# Allegro board SAFELIGHT1_4.brd
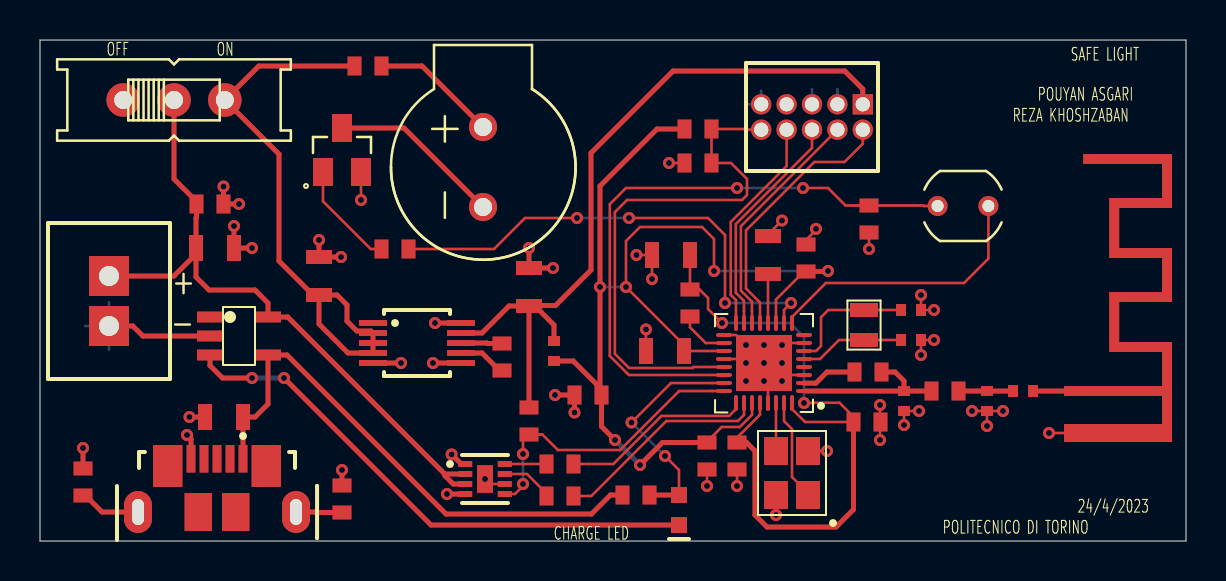
[diagram p0: board, top side]
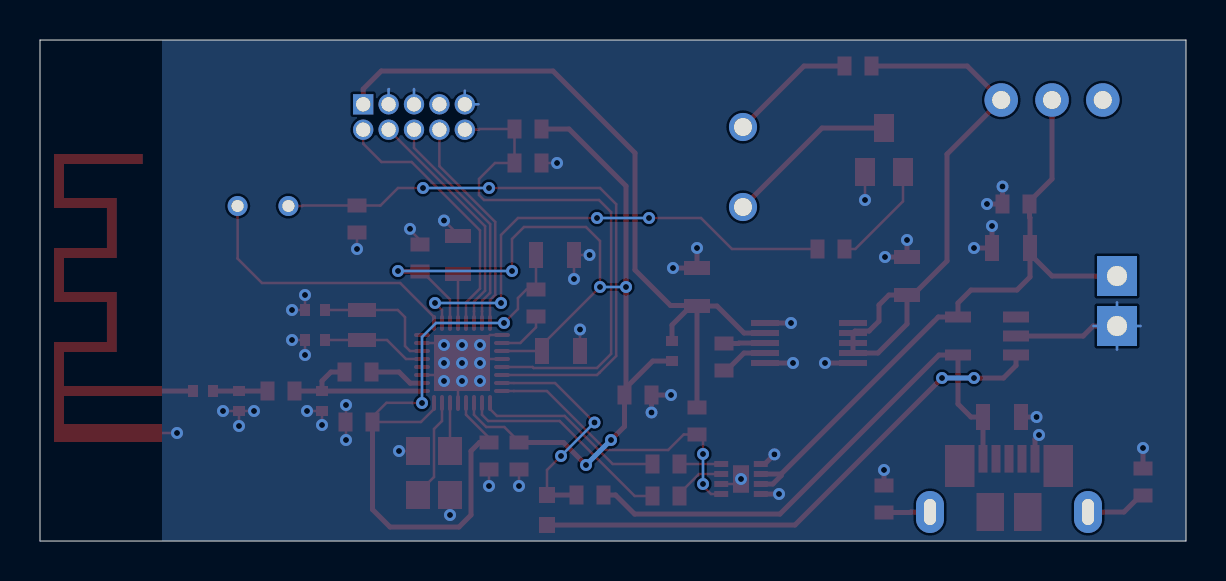
[diagram p1: board, bottom side, seen from below]

Outline 57.3 x 25.05 mm; copper layers: TOP, BOTTOM. Coordinates in mm from the lower left corner of the outline.
Outline path: 0,25.05 0,0 57.3,0 57.3,25.05 0,25.05

## Design rules (mm)
constraint set DEFAULT: min track width 0.127

## Placement (name value [footprint] x y rotation side)
A1  TI AN043  [AN043_PATCH_ANTENNA]  51.7 4.45 270 top
BJT1  MMBT3904  [SOT95P240X120-3N]  15.1 19.55 0 top
BUZ1  AT-1127-ST-2-R  [XDCR_AT-1127-ST-2-R]  22.15 18.7 90 top
C1  12p  [0402_C]  43.55 10.05 0 top
C2  12p  [0402_C]  43.55 11.55 0 top
C3  1uF  [0805_C]  36.4 14.3 270 top
C4  100nF  [0603_C]  38.3 14.15 90 top
C5  100nF  [0603_C]  33.35 4.25 270 top
C6  10uF  [0805_C]  31.25 9.5 180 top
C7  10uF  [0805_C]  31.55 14.3 180 top
C8  100nF  [0603_C]  27.4 7.3 180 top
C9  100nF  [0603_C]  41.35 5.95 0 top
C10  100nF  [0603_C]  34.85 4.25 270 top
C11  12pF  [0402_C]  49.15 7.5 0 top
C12  1.2pF  [0402_C]  43.2 7 270 top
C13  1.2pF  [0402_C]  47.35 7 270 top
C14  100nF  [0603_C]  32.9 18.9 180 top
C15  330nF  [0603_C]  23.1 9.2 270 top
C16  10uF  [0805_C]  24.45 12.7 90 top
C17  10uF  [0805_C]  13.95 13.25 90 top
C18  1uF  [0805_C]  8.75 14.65 0 top
C19  100nF  [0603_C]  8.5 16.85 0 top
C20  1uF  [0805_C]  9.2 6.2 180 top
CHC1  MAXIM MAX1555  [SMD_MAX1555]  9.95 10.25 270 top
CON1  JST B2B-XH-A LF SN  [B2B-XH-A]  3.45 12 90 top
CYS1  24MHz  [TSX-3225_XTAL]  37.6 3.4 90 top
CYS2  32.768MHz  [SC-20S_XTAL]  41.2 10.8 90 top
FG1  MAXIM MAX17048  [MAX17048]  22.25 3.1 270 top
J1  SAMTEC FTSH-105-01-L-D-K  [SAMTEC_FTSH-105-01-L-D-K]  38.6 21.2 180 top
L1  10uH  [0603_L]  32.5 11.9 90 top
L2  FerriteBead  [0402_L]  25.7 9.5 270 top
L3  15nH  [0603_L]  41.4 8.45 0 top
L4  2nH  [0603_L]  45.25 7.5 0 top
LED1  GEN  [0603_LED]  31.95 1.55 90 top
LS1  -  [PDV-P8001]  46.15 16.75 180 top
M1  TI CC2640R2F RSM  [CC2640R2FRSM]  36.2 8.9 90 top
R1  33  [0603_R]  16.4 23.75 0 top
R2  2k  [0603_R]  17.75 14.6 180 top
R3  2k  [0603_R]  41.45 16.1 270 top
R4  100K  [0603_R]  32.9 20.6 0 top
R5  33K  [0603_R]  2.15 2.95 270 top
R6  3.3K  [0603_R]  24.45 6 270 top
R7  220  [0603_R]  26 2.25 0 top
R8  220  [0603_R]  26 3.85 0 top
R9  200  [0603_R]  29.8 2.3 0 top
R10  33K  [0603_R]  15.1 2.1 90 top
SW1  SIS  [EG1218]  6.7 22.05 0 top
USB1  MOLEX 1051640001  [MOLEX_105164-0001]  8.85 3 0 top
VR1  MAXIM MAX1759  [MAX1759]  18.85 9.9 270 top

## Library data of the parts
A1 = ANTENNA
BJT1 = MMBT3904
BUZ1 = AT-1127-ST-2-R
C1-C20 = CAP
CHC1 = MAX1555
CON1 = JST B2B-XH-A LF SN
CYS1 = CRYSTAL_24M
CYS2 = CRYSTAL_32768
FG1 = MAXIM MAX17048
J1 = SAMTEC FTSH-105-01-L-D-K
L1 L3 L4 = IND
L2 = FerriteBead
LED1 = LED
LS1 = PDV-P8001
M1 = CC2640
R1-R10 = RES
SW1 = SIS
USB1 = MOLEX 1051640001
VR1 = MAX1759

## Footprints (pads in the part's own frame, mm; a bottom-side part is the same pattern mirrored in y, then rotated)
0402_C
  rect 0.5x0.6 smd: 1(-0.5,0) 2(0.5,0)
0402_L
  rect 0.5x0.6 smd: 1(-0.5,0) 2(0.5,0)
0603_C
  rect 0.7x0.95 smd: 1(-0.675,0) 2(0.675,0)
0603_L
  rect 0.7x0.95 smd: 1(-0.675,0) 2(0.675,0)
0603_LED
  rect 0.8x0.8 smd: 1(-0.75,0) 2(0.75,0)
0603_R
  rect 0.7x0.95 smd: 1(-0.675,0) 2(0.675,0)
0805_C
  rect 0.7x1.3 smd: 1(-0.95,0) 2(0.95,0)
AN043_PATCH_ANTENNA
  rect 0.9x0.5 smd: 1(-0.95,-0.25)
  rect 0.5x0.5 smd: 2(-3.05,-0.25)
B2B-XH-A
  rect 2x2 hole 1: 1(-1.25,0) 2(1.25,0)
CC2640R2FRSM
  rrect 0.2x0.8 smd: 1(-1.4,-2) 2(-1,-2) 3(-0.6,-2) 4(-0.2,-2) 5(0.2,-2) 6(0.6,-2) 7(1,-2) 8(1.4,-2) 24(-1.4,2)
  rrect 0.8x0.2 smd: 9(2,-1.4) 10(2,-1) 11(2,-0.6) 12(2,-0.2) 13(2,0.2) 14(2,0.6) 15(2,1) 16(2,1.4) 25(-2,1.4) 26(-2,1) 27(-2,0.6) 28(-2,0.2) 29(-2,-0.2) 30(-2,-0.6) 31(-2,-1) 32(-2,-1.4)
  rrect 0.2x0.8 smd rot 0.2: 17(1.4,2) 18(1,2) 19(0.6,2) 20(0.2,2) 21(-0.2,2) 22(-0.6,2) 23(-1,2)
  rect 2.8x2.8 smd: 33(0,0)
EG1218
  round 1.676 hole 0.9: O(-2.54,0) P(0,0) S(2.54,0)
MAX1759
  rect 0.3x1.4 smd: 1(-1,-2.2) 2(-0.5,-2.2) 3(0,-2.2) 4(0.5,-2.2) 5(1,-2.2) 6(1,2.2) 7(0.5,2.2) 8(0,2.2) 9(-0.5,2.2) 10(-1,2.2)
MAX17048
  rect 0.3x0.7 smd: 1(-0.75,-0.99) 2(-0.25,-0.99) 3(0.25,-0.99) 4(0.75,-0.99) 5(0.75,0.99) 6(0.25,0.99) 7(-0.25,0.99) 8(-0.75,0.99)
  rect 1.38x0.8 smd: 9(0,0)
MOLEX_105164-0001
  rect 0.45x1.38 smd: 1(1.3,1.11) 2(0.65,1.11) 3(0,1.11) 4(-0.65,1.11) 5(-1.3,1.11)
  rect 1.375x1.9 smd: P1(-0.938,-1.55) P2(0.938,-1.55)
  rect 1.475x2.1 smd: P3(-2.462,0.75) P4(2.462,0.75)
  oval 1.4x2.1 hole 0.6x1.3: S1(-3.95,-1.55) S2(3.95,-1.55)
PDV-P8001
  round 1 hole 0.6: 1(-1.27,0) 2(1.27,0)
SAMTEC_FTSH-105-01-L-D-K
  rect 1.016x1.016 hole 0.711: 1(-2.54,-0.635)
  round 1.016 hole 0.711: 2(-2.54,0.635) 3(-1.27,-0.635) 4(-1.27,0.635) 5(0,-0.635) 6(0,0.635) 7(1.27,-0.635) 8(1.27,0.635) 9(2.54,-0.635) 10(2.54,0.635)
SC-20S_XTAL
  rect 0.7x1.4 smd: 1(-0.75,0) 2(0.75,0)
SMD_MAX1555
  rect 0.55x1.3 smd: 1(-0.95,-1.45) 2(0,-1.45) 3(0.95,-1.45) 4(0.95,1.45) 5(-0.95,1.45)
SOT95P240X120-3N
  rect 1x1.4 smd: 1(-0.95,-1.1) 2(0.95,-1.1) 3(0,1.1)
TSX-3225_XTAL
  rect 1.4x1.2 smd: 1(-1.1,-0.8) 2(1.1,-0.8) 3(1.1,0.8) 4(-1.1,0.8)
XDCR_AT-1127-ST-2-R
  round 1.408 hole 0.9: N(-2,0) P(2,0)

## Nets
GND: A1.1(-) BJT1.2(E) C1.2(B) C2.2(B) C3.1 C4.2(B) C5.2(B) C6.2(B) C7.2(B) C8.2(B) C9.2(B) C10.2(B) C12.2(B) C13.2(B) C14.2(B) C16.2(B) C17.2(B) C18.2(B) C19.2(B) C20.2(B) CHC1.2 CON1.1 CYS1.2 CYS1.4 FG1.1 FG1.4 FG1.6 FG1.9 J1.3 J1.5 J1.9 M1.3 M1.7 M1.17 M1.20 M1.29 M1.33 R3.2(B) R5.1 R10.2(B) USB1.5 VR1.5 VR1.6 VR1.10
VCC: C16.1 J1.1 L2.1 R6.1 VR1.9
VDDR: C7.1 C9.1 C10.1 L1.2(B) M1.28 M1.32
VDDS: C4.1 C5.1 C6.1 C8.1 L2.2(B) M1.11 M1.19 M1.27 R4.1
ALRTN: FG1.5 M1.24 R6.2(B)
ANTENNA: A1.2 C11.2(B)
BAT+: C18.1 C19.1 CHC1.5 CON1.2 FG1.2 FG1.3(VDD) SW1.P
BUZ: M1.10 R2.1
BUZ_IN: BUZ1.P R1.2(B)
BUZZNEG: BJT1.3 BUZ1.N
CHG: CHC1.3 LED1.1(-)
CXN: C15.2(B) VR1.7
CXP: C15.1 VR1.8
DC: C20.1 CHC1.4 R9.1 USB1.1
DCDC_IN: C17.1 R1.1 SW1.S VR1.2(SHDN) VR1.3 VR1.4
DCDC_SW: L1.1 M1.18
DCOUPL: C3.2(B) M1.12
FILTER: C11.1 C13.1 L4.2(B)
LED: LED1.2 M1.23 R9.2(B)
RESET: C14.1 J1.10 M1.21 R4.2(B)
RF_N: L3.1 M1.2
RF_P: C12.1 L3.2(B) L4.1 M1.1
SCL: M1.26 R7.2(B)
SCL_OUT: FG1.7 R7.1
SDA: M1.25 R8.2(B)
SDA_OUT: FG1.8 R8.1
SENSOR_MTR: LS1.2(PS2) M1.22 R3.1
SENSOR_ON: LS1.1 M1.9
TCKC: J1.4 M1.14
TDI: J1.8 M1.16
TDO: J1.6 M1.15
TMSC: J1.2 M1.13
TRB: BJT1.1 R2.2(B)
X24M_N: CYS1.3 M1.30
X24M_P: CYS1.1 M1.31
X32K_Q1: C1.1 CYS2.1 M1.5
X32K_Q2: C2.1 CYS2.2(B) M1.6(X32K_Q2)
N183563: R5.2(B) USB1.S1
N183606: R10.1 USB1.S2(SHIELD2)

Pads without a net: CHC1 1; J1 7; M1 4 8; SW1 O; USB1 2 3 4 P1 P2 P3 P4; VR1 1

## Via types
v1: diameter 0.6, hole 0.3, TOP to BOTTOM, 73 vias

## Routing (per net, layer and track width the routed paths; a pad name or vN(x,y) marks a point on that pad's centre or on a via; arc(x,y) is an arc through that point)
GND: length 60.4
  TOP w0.127: C3.1 36.4,15.32 v1(37.1,16.02) ; M1.3 37.4,8.3 v1(37.1,8) ; 32.22,18.9 v1(31.45,18.9) ; v1(22.25,3.1) 22.5,2.85 FG1.6 ; v1(38.8,15.61) 38.8,15.55 38.3,15.05 C4.2 ; CYS1.2 v1(39.35,4.5) ; v1(44.05,9.3) C1.2 v1(44.7,10.05) ; M1.20 35.1,9.1 v1(35.3,8.9) ; v1(30.6,13.1) C7.2 v1(29.82,14.3) ; v1(50.45,5.4) A1.1 ; v1(47.35,5.75) C13.2 ; C13.2 v1(48.15,6.5) ; C13.2 v1(46.6,6.5) ; v1(43.95,6.5) C12.2 v1(43.2,5.8) ; R3.2 v1(41.45,14.6) ; M1.29 36.4,7.8 v1(36.2,8) ; v1(37.1,9.8) 37.2,9.9 M1.7 ; v1(44.7,11.55) C2.2 v1(44.05,12.3) ; C6.2 v1(30.3,10.58) ; v1(42,6.8) 42,5.98 C9.2 42,5.93 v1(42,5.05) ; C10.2 v1(34.85,2.75) ; M1.17 34.8,10.3 v1(35.3,9.8) ; CYS1.4 v1(36.8,1.3) ; C5.2 v1(33.35,2.75) ; BJT1.2 v1(16.05,17.05)
  TOP w0.25: v1(26.72,6.43) 26.72,7.3 v1(25.75,7.3) ; R5.1 v1(2.15,4.65) ; v1(24.45,14.65) C16.2 v1(25.65,13.65) ; v1(7.47,6.2) C20.2 ; FG1.4 v1(20.35,2.35) ; v1(20.58,4.33) 21.06,3.85 FG1.1 ; VR1.6 v1(19.65,8.9) ; CHC1.2 5.14,10.25 4.64,10.75 CON1.1 ; v1(7.35,5.3) 7.55,5.1 USB1.5 ; v1(10.6,14.65) C18.2 v1(9.7,15.75) ; v1(15.05,14.2) C17.2 v1(13.95,15.05) ; v1(9.17,17.73) C19.2 v1(9.95,16.85) ; VR1.10 v1(19.75,10.9) ; R10.2 v1(15.1,3.55) ; VR1.5 v1(18.05,8.9)
  BOTTOM w0.127: J1.5 38.6,22.6 ; CON1.1 3.45,11.93 ; CON1.1 3.45,9.57 ; CON1.1 4.63,10.75 ; CON1.1 2.27,10.75 ; 36.06,22.52 J1.9 35.37,21.84 ; 39.85,22.6 39.87,22.58 J1.3
  vias: v1(35.3,8) v1(36.2,9.8) v1(36.2,8.9) v1(37.1,8.9)
VCC: length 37.3
  TOP w0.25: C16.1 23.45,11.75 22.1,10.4 VR1.9 ; C16.1 24.47,11.77 24.73,11.77 ; C16.1 24.45,6.68 ; J1.1 41.14,22.59 40.23,23.5 31.65,23.5 27.55,19.4 27.55,13.55 25.77,11.77 24.73,11.77 ; L2.1 25.7,10.8 24.73,11.77
VDDR: length 35.3
  TOP w0.127: M1.28 36,6.32 34.85,5.17 C10.1 ; C7.1 L1.2 32.97,12.58 33.4,12.15 33.4,11.6 v1(34.1,10.9) ; v1(38.2,6.9) 38.69,6.9 38.7,6.91 39.98,6.91 40.67,6.21 C9.1 38.25,5.95 37.6,6.6 M1.32
  TOP w0.25: C9.1 40.67,1.58 39.8,0.7 36.35,0.7 35.75,1.3 35.75,4.5 35.33,4.93 C10.1
  BOTTOM w0.127: v1(38.2,6.9) 38.2,10.2 37.5,10.9 v1(34.1,10.9)
VDDS: length 56.9
  TOP w0.127: M1.19 C6.1 32.2,9.8 v1(29.3,12.7) 29.3,15 30,15.7 33.1,15.7 33.7,15.1 v1(33.7,13.5) ; C5.1 33.35,4.97 34.08,5.7 34.99,5.7 35.6,6.31 M1.27 ; C4.1 38.2,13.48 36.8,12.08 M1.11
  TOP w0.25: v1(30,3.8) 31.12,4.93 C5.1 ; v1(28.75,5.05) 28.08,5.73 C8.1 28,7.38 28,7.66 ; C4.1 39.38,13.48 v1(39.4,13.5) ; 28,7.66 26.66,9 L2.2 ; 28,7.66 v1(28,12.7) 28,17.75 30.85,20.6 32.22,20.6
  BOTTOM w0.127: v1(33.7,13.5) v1(39.4,13.5) ; v1(29.3,12.7) v1(28,12.7)
  BOTTOM w0.25: v1(30,3.8) v1(28.75,5.05)
ALRTN: length 15.1
  TOP w0.127: v1(24.15,2.85) 24.15,2.75 23.75,2.35 FG1.5 ; M1.24 33.61,7.5 33.61,7.5 31.95,7.5 29.01,4.55 25.89,4.55 25.12,5.33 R6.2 24.15,5.03 v1(24.15,4.35)
  BOTTOM w0.127: v1(24.15,4.35) v1(24.15,2.85)
ANTENNA: length 1.8
  TOP w0.25: C11.2 A1.2
BAT+: length 33.4
  TOP w0.25: 20.24,3.34 20.25,3.35 FG1.2 ; 20.24,3.34 20.24,3.27 20.66,2.85 FG1.3 ; 20.24,3.34 12.38,11.2 CHC1.5 11.4,11.9 10.75,12.55 8.45,12.55 7.8,13.2 7.8,14.35 ; CON1.2 6.7,13.25 7.8,14.35 ; 7.8,14.35 C18.1 7.8,16.16 7.83,16.18 C19.1 7.83,16.98 6.7,18.1 SW1.P
BUZ: length 24.7
  TOP w0.127: v1(26.85,16.15) 24.25,16.15 22.7,14.6 R2.1 ; v1(29.45,16.15) 33.4,16.15 34.25,15.3 v1(34.25,11.9) ; M1.10 37.2,11.55 v1(37.55,11.9)
  BOTTOM w0.127: v1(37.55,11.9) v1(34.25,11.9) ; v1(26.85,16.15) v1(29.45,16.15)
BUZ_IN: length 6.4
  TOP w0.25: 22.2,20.65 BUZ1.P 19.1,23.75 R1.2
BUZZNEG: length 8.8
  TOP w0.25: 22.2,16.65 BUZ1.N 18.2,20.65 BJT1.3
CHG: length 27.3
  TOP w0.25: v1(10.6,8.15) 9.12,8.15 8.5,8.77 CHC1.3 ; v1(12.2,8.15) 19.55,0.8 LED1.1
  BOTTOM w0.25: v1(12.2,8.15) v1(10.6,8.15)
CXN: length 2.4
  TOP w0.25: VR1.7 22.1,9.4 22.97,8.53 C15.2
CXP: length 2.1
  TOP w0.25: VR1.8 22.35,9.9 22.37,9.88 C15.1
DC: length 27.5
  TOP w0.25: USB1.1 C20.1 10.75,6.2 11.4,6.85 CHC1.4 12.35,9.3 20.3,1.35 27.57,1.35 28.52,2.3 R9.1
DCDC_IN: length 28.8
  TOP w0.25: C17.1 13.95,10.85 15.4,9.4 VR1.4 VR1.3 VR1.2 16.55,10.5 15.85,10.5 15.35,10.99 15.35,11.8 14.85,12.3 C17.1 ; C17.1 13.65,12.3 11.95,14 11.95,19.34 SW1.S 10.94,23.75 15.72,23.75
DCDC_SW: length 2.6
  TOP w0.127: L1.1 32.5,10.68 33.28,9.9 M1.18
DCOUPL: length 2.5
  TOP w0.127: C3.2 M1.12
FILTER: length 2.7
  TOP w0.25: C11.1 C13.1 L4.2
LED: length 11.5
  TOP w0.127: v1(31.25,4.25) 31.95,3.55 LED1.2 ; M1.23 33.61,7.9 31.55,7.9 v1(29.58,5.93)
  TOP w0.25: R9.2 LED1.2
  BOTTOM w0.127: v1(29.58,5.93) v1(31.25,4.25)
RESET: length 26.9
  TOP w0.127: M1.21 32.67,8.7 32.62,8.65 29.45,8.65 28.74,9.36 28.74,16.44 29.35,17.05 35.1,17.05 35.35,17.3 35.35,18.1 34.55,18.9 C14.1 R4.2 35.33,20.6 35.36,20.57 J1.10
RF_N: length 2.8
  TOP w0.25: M1.2 38.21,7.89 38.79,7.89 39.35,8.45 L3.1
RF_P: length 8.2
  TOP w0.25: C12.1 43.2,8 42.75,8.45 42.08,8.45 ; C12.1 M1.1 ; C12.1 L4.1
SCL: length 10.8
  TOP w0.127: M1.26 35.2,6.31 34.89,6 31.32,6 27.57,2.25 R7.2
SCL_OUT: length 2.6
  TOP w0.127: R7.1 25.33,2.38 24.35,3.35 FG1.7
SDA: length 9.6
  TOP w0.127: R8.2 28.67,3.85 31.07,6.25 34.46,6.25 34.8,6.6 M1.25
SDA_OUT: length 2.1
  TOP w0.127: FG1.8 R8.1
SENSOR_MTR: length 30.8
  TOP w0.127: M1.22 29.45,8.3 29.34,8.41 29.34,8.41 28.49,9.25 28.49,16.84 29.3,17.65 v1(34.85,17.65) ; v1(38.15,17.65) 39.4,17.65 40.27,16.78 R3.1 44.16,16.78 44.19,16.75 LS1.2
  BOTTOM w0.127: v1(38.15,17.65) v1(34.85,17.65)
SENSOR_ON: length 14
  TOP w0.127: LS1.1 47.42,14.12 46.2,12.9 39.29,12.9 37.6,11.2 M1.9
TCKC: length 11.9
  TOP w0.127: M1.14 35.6,11.49 35.6,11.49 35.6,11.96 35.05,12.52 35.05,15.74 J1.4
TDI: length 10.9
  TOP w0.127: J1.8 37.33,18.74 34.54,15.95 34.54,12.31 34.6,12.24 34.8,12.05 34.8,11.54 M1.16
TDO: length 11.4
  TOP w0.127: J1.6 38.6,19.65 34.79,15.85 34.79,12.41 34.83,12.37 35.2,12 35.2,11.49 35.2,11.49 M1.15
TMSC: length 13.3
  TOP w0.127: J1.2 41.14,19.87 40.22,18.95 38.72,18.95 35.3,15.53 35.3,12.62 36,11.92 M1.13
TRB: length 5.4
  TOP w0.127: R2.2 16.53,14.6 14.15,16.98 BJT1.1
X24M_N: length 2.4
  TOP w0.127: CYS1.3 M1.30
X24M_P: length 5.1
  TOP w0.127: CYS1.1 38.4,2.4 37.6,3.2 37.6,5.6 37.2,6 M1.31
X32K_Q1: length 5.2
  TOP w0.127: M1.5 39,9.1 39.95,10.05 CYS2.1 C1.1
X32K_Q2: length 6.5
  TOP w0.127: M1.6 38.8,9.5 39.05,9.75 39.05,11.19 39.41,11.55 CYS2.2 C2.1
N183563: length 3.1
  TOP w0.25: USB1.S1 3.1,1.45 2.28,2.28 R5.2
N183606: length 2.3
  TOP w0.25: R10.1 13.78,1.43 13.75,1.45 USB1.S2

## Copper pours and planes (outline as drawn; the poured copper is in the pictures)
GND on BOTTOM: 0,25.05 0,0 51.2,0 51.2,25.05
ANTENNA on TOP (solid shape): 56.6,16.65 53.96,16.65 53.96,14.65 56.6,14.65 56.6,11.95 53.96,11.95 53.96,9.95 56.6,9.95 56.6,4.95 51.7,4.95 51.7,5.85 56.1,5.85 56.1,7.25 51.7,7.25 51.7,7.75 56.1,7.75 56.1,9.45 53.46,9.45 53.46,12.45 56.1,12.45 56.1,14.15 53.46,14.15 53.46,17.15 56.1,17.15 56.1,18.85 52.16,18.85 52.16,19.35 56.6,19.35

## Text on the board
Ref Des/Silkscreen Top: OFF | ON | CHARGE LED | POLITECNICO DI TORINO | REZA KHOSHZABAN | POUYAN ASGARI | SAFE LIGHT | 24/4/2023 | - | +
